# EAGLE board magchess3 (EAGLE 9.3.0)
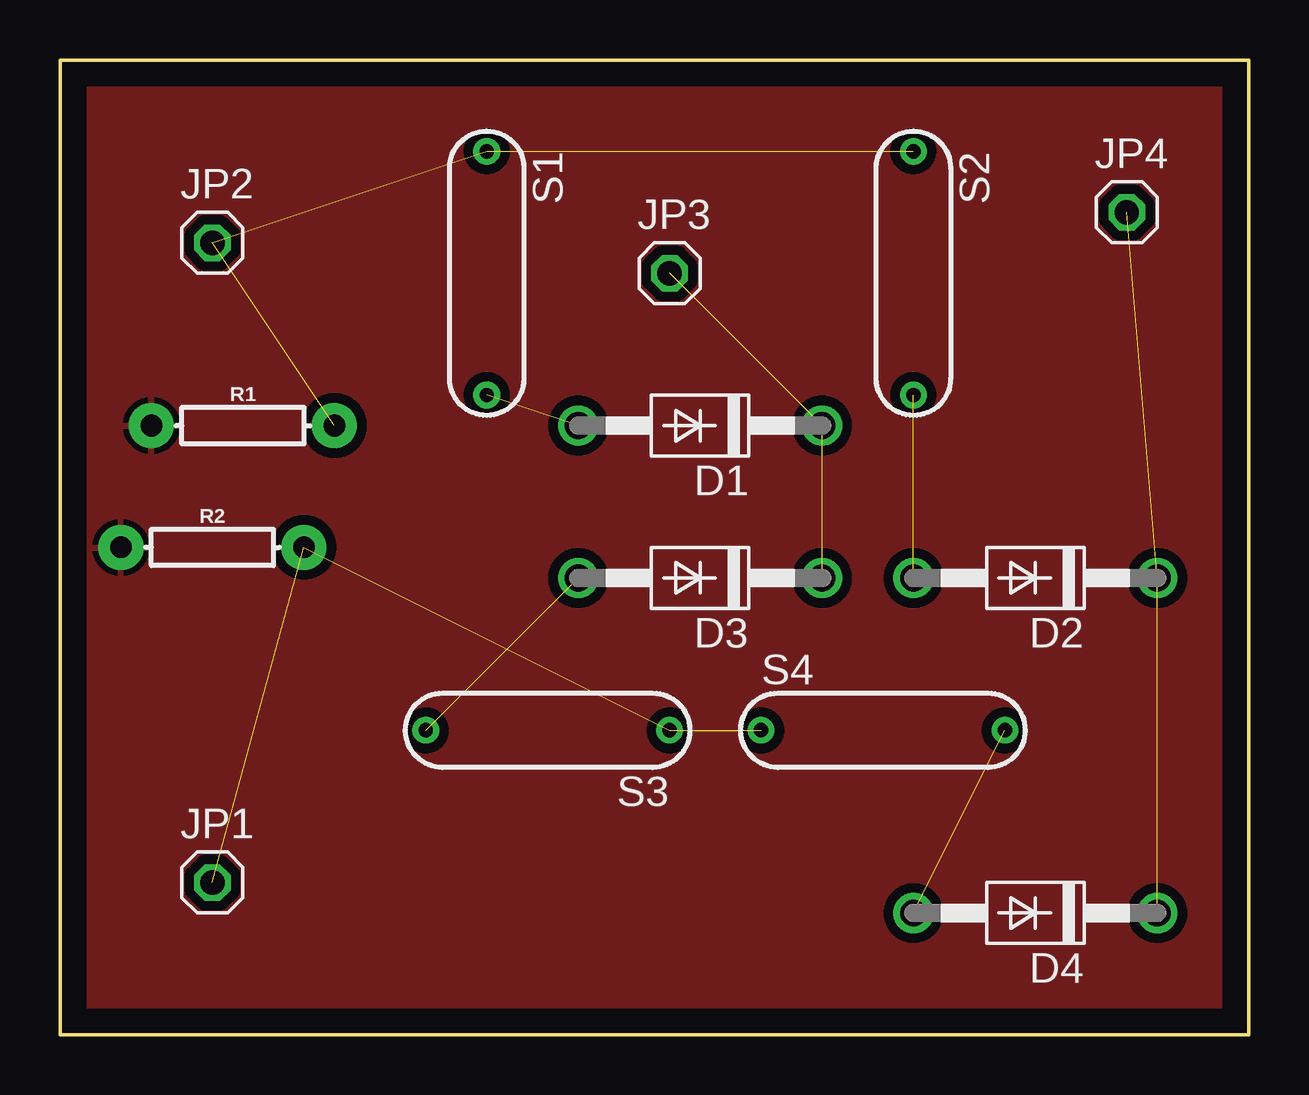
[diagram p0: board, top side]

Size 49.53 x 40.64 mm. Coordinates in mm from the lower left corner, seen from the top.
Outline: 0,40.64 49.53,40.64 49.53,0 0,0 0,40.64
Copper layers (1*16): Top 0.035mm / dielectric 1.5mm / Bottom 0.035mm
Design rules "default": minimum track width 6mil, minimum drill 0.35mm, track to track 6mil, track to pad 6mil, pad to pad 6mil, via to via 6mil, smd to smd 6mil, copper to edge 40mil, drill to drill 6mil, minimum pad ring 10mil, minimum via ring 8mil, stop-mask expansion 4mil, vias tented up to drill 0mil, thermal gap 10mil
Net classes: 0 default: width 0.406 mm, clearance 0.406 mm

## Footprints (pad centres in the part's own frame; a part is rotated, then mirrored left to right if it is on the bottom)
DO41-10 = drill 1.118: A 5.08,0; C -5.08,0
1X01 = drill 1.016 octagon: 1 0,0
AXIAL-0.3 = drill 0.9 pad 1.88: P$1 -3.81,0; P$2 3.81,0
MK6-4 = drill 0.6 pad 1.016: 1 -5.08,0; 2 5.08,0

## Placement (x,y rotation side)
D1  1N4004  [DO41-10]  26.67,25.4 180 top
D2  1N4004  [DO41-10]  40.64,19.05 180 top
D3  1N4004  [DO41-10]  26.67,19.05 180 top
D4  1N4004  [DO41-10]  40.64,5.08 180 top
JP1  [1X01]  6.35,6.35 0 top
JP2  [1X01]  6.35,33.02 0 top
JP3  [1X01]  25.4,31.75 0 top
JP4  [1X01]  44.45,34.29 0 top
R1  10k  [AXIAL-0.3]  7.62,25.4 0 top
R2  10k  [AXIAL-0.3]  6.35,20.32 0 top
S1  REED-SWITCH-MK6-4  [MK6-4]  17.78,31.75 270 top
S2  REED-SWITCH-MK6-4  [MK6-4]  35.56,31.75 270 top
S3  REED-SWITCH-MK6-4  [MK6-4]  20.32,12.7 180 top
S4  REED-SWITCH-MK6-4  [MK6-4]  34.29,12.7 0 top

## Library data of the parts
D1-D4 = diode
JP1-JP4 = pinhead
R1 R2 = SparkFun-Resistors; PROD_ID: RES-09435
S1-S4 = switch-reed; OC_FARNELL: unknown

## Nets
GND: R1.P$1 R2.P$1
N$1: JP2.1 R1.P$2 S1.1 S2.1
N$2: JP1.1 R2.P$2 S3.1 S4.1
N$3: D1.A S1.2
N$4: D3.A S3.2
N$5: D4.A S4.2
N$6: D2.A S2.2
N$7: D2.C D4.C JP4.1
N$8: D1.C D3.C JP3.1

## Tracks (layer width: path | path; a pad name or v marks a point on that pad's centre or on a via)
GND
  pour Top: -11.43,59.69 -11.43,-8.89 66.04,-8.89 66.04,57.15 0,57.15 0,59.69
N$1  (3 unrouted)
N$2  (3 unrouted)
N$3  (1 unrouted)
N$4  (1 unrouted)
N$5  (1 unrouted)
N$6  (1 unrouted)
N$7  (2 unrouted)
N$8  (2 unrouted)